# Altium PCB FV1Buddy.PcbDoc
Units mm, origin at the board's own origin, x right, y up, seen from the top; angles counter-clockwise.
Board outline 10.6 x 10.89 mm, 2 copper layers (Top Layer, Bottom Layer); 9 components, 10 nets, 28 pads, 5 vias.
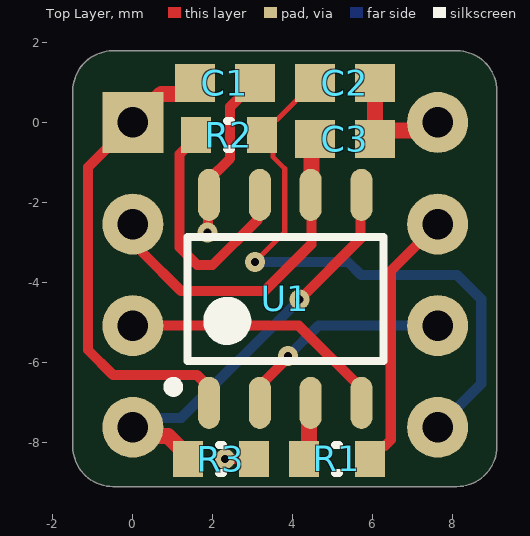
[diagram p0: Top Layer view]
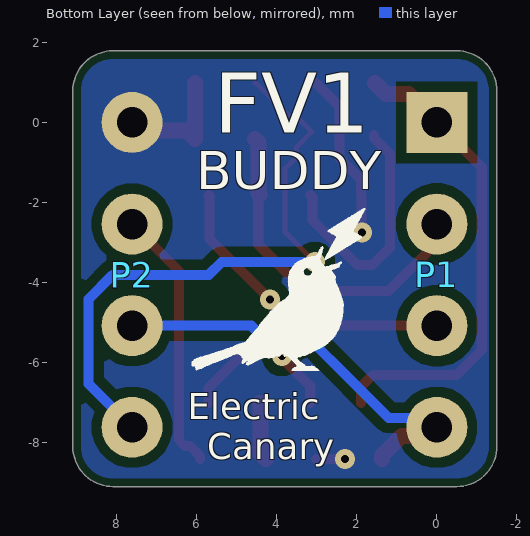
[diagram p1: Bottom Layer view, seen from below]

## Layer stack, top to bottom
Top Solder: solder mask 0.0102, Solder Resist, Dk 3.5
Top Layer: signal copper 0.0356
Dielectric 1: dielectric 0.32, FR-4, Dk 4.8
Bottom Layer: signal copper 0.0356
Bottom Solder: solder mask 0.0102, Solder Resist, Dk 3.5

## Board outline
-1.5,-8.102 -1.5,0.79 cw(c-0.5,0.79) -0.5,1.79 8.1,1.79 cw(c8.1,0.79) 9.1,0.79 9.1,-8.102 cw(c8.1,-8.102) 8.1,-9.102 -0.5,-9.102 cw(c-0.5,-8.102)

## Design rules (kind name [scope] priority, off if disabled: settings)
BoardOutlineClearance [All] p1: gap=0.2 ignorepadtopadclearanceinfootprint=FALSE except(0: Arc-SplitContinuation Track-SplitContinuation SMDPad-SplitContinuation THPad-SplitContinuation Via-SplitContinuation Fill-SplitContinuation Poly-SplitContinuation Region-SplitContinuation Text-SplitContinuation)
Clearance [All] p1: gap=0.254 ignorepadtopadclearanceinfootprint=FALSE except(0: Arc-Hole Track-Hole SMDPad-Hole THPad-Hole Via-Hole Fill-Hole Poly-Hole Region-Hole Text-Hole; 0.127: SMDPad-SMDPad; 0.2: Arc-THPad Track-THPad)
MinimumSolderMaskSliver [All] p1: minsoldermaskwidth=0.2
PlaneConnect [All] p1: planeconnectstyle=Direct reliefexpansion=0.508 reliefentries=4 reliefconductorwidth=0.254 reliefairgap=0.254
PolygonConnect [All] p1: connectstyle=Direct reliefconductorwidth=0.254 reliefentries=4 polygonreliefangle="90 Angle" airgapwidth=0.254
RoutingVias [All] p1: holewidth=0.4 width=0.7 viastyle="Through Hole" minholewidth=0.2 minwidth=0.5 maxholewidth=0.711 maxwidth=1.27
SilkToSilkClearance [All] p1: silktosilkclearance=0.1
SolderMaskExpansion SolderMaskExpansion_1 [IsVia] p1: expansion=0.102 istentingtop=TRUE
SolderMaskExpansion [All] p2: expansion=0.05 istentingtop=FALSE
Width [All] p1: maxlimit=0.4 minlimit=0.127 preferedwidth=0.254 minimp=50.000000 maximp=50.000000 favimp=50.000000
27 further rules are at their usual default settings.

## Components (designator, comment, footprint, x,y, rotation, side; value= is the part's Value field where it differs from the comment)
C1 "C_NP_0603_Generic" CAPC1608X09N 2.3,0.99 r0 top value=100n
C2 "C_NP_0603_Generic" CAPC1608X09N 5.3,0.99 r180 top value=10u
C3 "C_NP_0603_Generic" CAPC1608X09N 5.3,-0.41 r0 top value=100n
P1 "4 Header" H4#1 0,-3.81 r180 bottom
P2 "4 Header" H4#2 7.62,-3.81 r180 bottom
R1 "R_0603_Generic" RESC1608X06N 5.1,-8.41 r0 top value=1k
R2 "R_0603_Generic" RESC1608X06N 2.4,-0.31 r0 top value=1k
R3 "R_0603_Generic" RESC1608X06N 2.2,-8.41 r180 top value=27k
U1 "Attiny402" SOIC127P600X175-8L 3.81,-4.41 r90 top

## Footprints (in the part's own frame and the unit in brackets; to place one, negate y for a bottom-side part, rotate by r counter-clockwise, add the part's x,y. Pads: shape width x height; smd on the part's side, far side on the other; paste and mask are expansions set on the pad)
CAPC1608X09N [mm] "Chip Capacitor, 2-Leads, Body 1.60x0.80mm, IPC Medium Density"
  rect 1x0.95 smd: 1(-0.75,0) 2(0.75,0)
  body extent -0.85,-0.44 0.85,0.44, height 0.87
H4#1 [mil]
  rect 60x60 hole 30: 1(0,150)
  round 60 hole 30: 2(0,50) 3(0,-50) 4(0,-150)
  body extent -49,-200 49,200, height 336
H4#2 [mil]
  round 60 hole 30: 1(0,150) 2(0,50) 3(0,-50) 4(0,-150)
  body extent -49,-200 49,200, height 336
RESC1608X06N [mm] "Chip Resistor, 2-Leads, Body 1.60x0.80mm, IPC Medium Density"
  rect 0.75x0.9 smd: 1(-0.825,0) 2(0.825,0)
  silkscreen extent -0.05,-0.35 0.05,0.35, body extent -0.8,-0.4 0.8,0.4, height 0.4
SOIC127P600X175-8L [mm] "SOIC, 8-Leads, Body 4,90x3,90mm, Pitch 1,27mm, IPC High Density"
  oval 1.3x0.55 smd: 1(-2.6,1.905) 2(-2.6,0.635) 3(-2.6,-0.635) 4(-2.6,-1.905) 5(2.6,-1.905) 6(2.6,-0.635) 7(2.6,0.635) 8(2.6,1.905)
  silkscreen extent -2.32,-2.45 1.55,2.92, body extent -3,-2.45 3,2.45, height 1.7

## Part data
C1 C2 C3: library part C0-STD-0007-4, "Generic 0603 Non Polarized Capacitor", Manufacturer=Generic, Package=0603, Category=Passive, Sub-Category=C
P1 P2: library part H4
R1 R2 R3: library part C0-STD-0006-9, "Generic 0603 Resistor", Manufacturer=Generic, Package=0603, Category=Passive, Sub-Category=R

## Via types
v1: diameter 0.5, hole 0.2, Top Layer to Bottom Layer, tented both sides, 5 vias

## Nets (pads, with @x,y where several pads share a name; then routed paths per layer and width w, separated by ;. In a path a pad name is that pad's centre, name@x,y a point inside that pad or via, vN(x,y) a via of type N, cw(c..) or ccw(c..) an arc to the next point about the centre after c; other vN are vias at no path point)
0V: C1.2 C2.1 C3.2 P2.1 R3.1 U1.8 | length 8.1
  Top Layer w0.254: v1(1.87,-2.755) 1.883,-2.743 1.883,-1.822 1.895,-1.81 1.895,-1.435 2.431,-0.899 2.431,0.396 3.025,0.99 C1.2 ; v1(2.3,-8.41) R3.1
  Top Layer w0.4: C2.1 C3.2 6.255,-0.205 7.415,-0.205 P2.1
+3V3: C1.1 P1.1 U1.1 | length 11.9
  Top Layer w0.254: P1.1 -1.121,-1.121 -1.121,-5.689 -0.5,-6.31 1.598,-6.31 1.895,-6.607 U1.1@1.895,-7.01
  Top Layer w0.4: P1.1 0.715,0.715 1.275,0.715 C1.1
CLK_48K: P2.3 U1.2 | length 5.5
  Top Layer w0.254: U1.2@3.165,-7.01 3.165,-6.594 3.877,-5.882 v1(3.877,-5.84)
  Bottom Layer w0.254: v1(3.877,-5.84) 4.637,-5.08 P2.3
DIV: P1.4 R3.2 U1.5 | length 10.5
  Top Layer w0.254: v1(4.17,-4.425) 5.687,-2.908 5.687,-1.828 U1.5@5.705,-1.81
  Top Layer w0.4: P1.4 0.215,-7.835 0.875,-7.835 1.375,-8.335 R3.2
  Bottom Layer w0.254: P1.4 0.235,-7.385 1.21,-7.385 v1(4.17,-4.425)
LED: P2.2 R1.2 | length 6.6
  Top Layer w0.254: R1.2 5.925,-8.335 6.173,-8.087 6.299,-8.087 6.448,-7.938 6.448,-3.712 P2.2
NetR1_1: R1.1 U1.3 | length 1.5
  Top Layer w0.4: R1.1 4.406,-8.279 4.406,-7.039 U1.3@4.435,-7.01
POT: P1.3 U1.4 | length 6.7
  Top Layer w0.254: P1.3 4.15,-5.08 5.705,-6.635 U1.4@5.705,-7.01
PWM: R2.1 U1.7 | length 6.2
  Top Layer w0.254: R2.1 1.575,-0.385 1.168,-0.792 1.168,-3.121 1.611,-3.564 1.993,-3.564 3.108,-2.449 3.108,-1.867 U1.7@3.165,-1.81
TAP: C3.1 P1.2 U1.6 | length 8.6
  Top Layer w0.254: P1.2 0.243,-2.783 0.243,-3.253 1.2,-4.21 3.3,-4.21 4.464,-3.046 U1.6@4.464,-1.781
  Top Layer w0.4: U1.6@4.435,-1.81 4.464,-1.781 4.464,-0.496 C3.1
VOUT: C2.2 P2.4 R2.2 | length 15.5
  Top Layer w0.127: v1(3.05,-3.487) 3.797,-2.74 3.797,-1.155 3.509,-0.867 3.509,-0.619 3.125,-0.235 3.437,0.077 3.612,0.077 4.525,0.99 C2.2
  Bottom Layer w0.254: v1(3.05,-3.487) 5.377,-3.487 5.7,-3.81 8.1,-3.81 8.709,-4.419 8.709,-6.531 P2.4

## Polygon pours and split planes (outlines as drawn)
0V on Bottom Layer "NONET_L-01_P-001" (solid, pour order 0): -1.5,-9.11 -1.5,1.69 9.1,1.69 9.1,-9.11

## Silkscreen, mask and mechanical layers (free items; w line width, h text height)
Bottom Overlay:
  drawing of 2 lines, arcs and shapes, not listed
  text "FV1" at 5.559,-0.26 h1.5
  text "BUDDY" at 6.016,-1.675 h0.95
  text "Electric" at 6.228,-7.425 h0.65
  text "Canary" at 5.741,-8.417 h0.65
Mechanical 1:
  the board outline again, w0.1